# Altium PCB PCB1.PcbDoc
Units mm, origin at the board's own origin, x right, y up, seen from the top; angles counter-clockwise.
Board outline 36.5 x 37.5 mm, 4 copper layers (L1(Signal), L2(GND), L3(GND), L4(Signal)), stack 1.57 mm thick; 34 components, 28 nets, 174 pads, 138 vias.
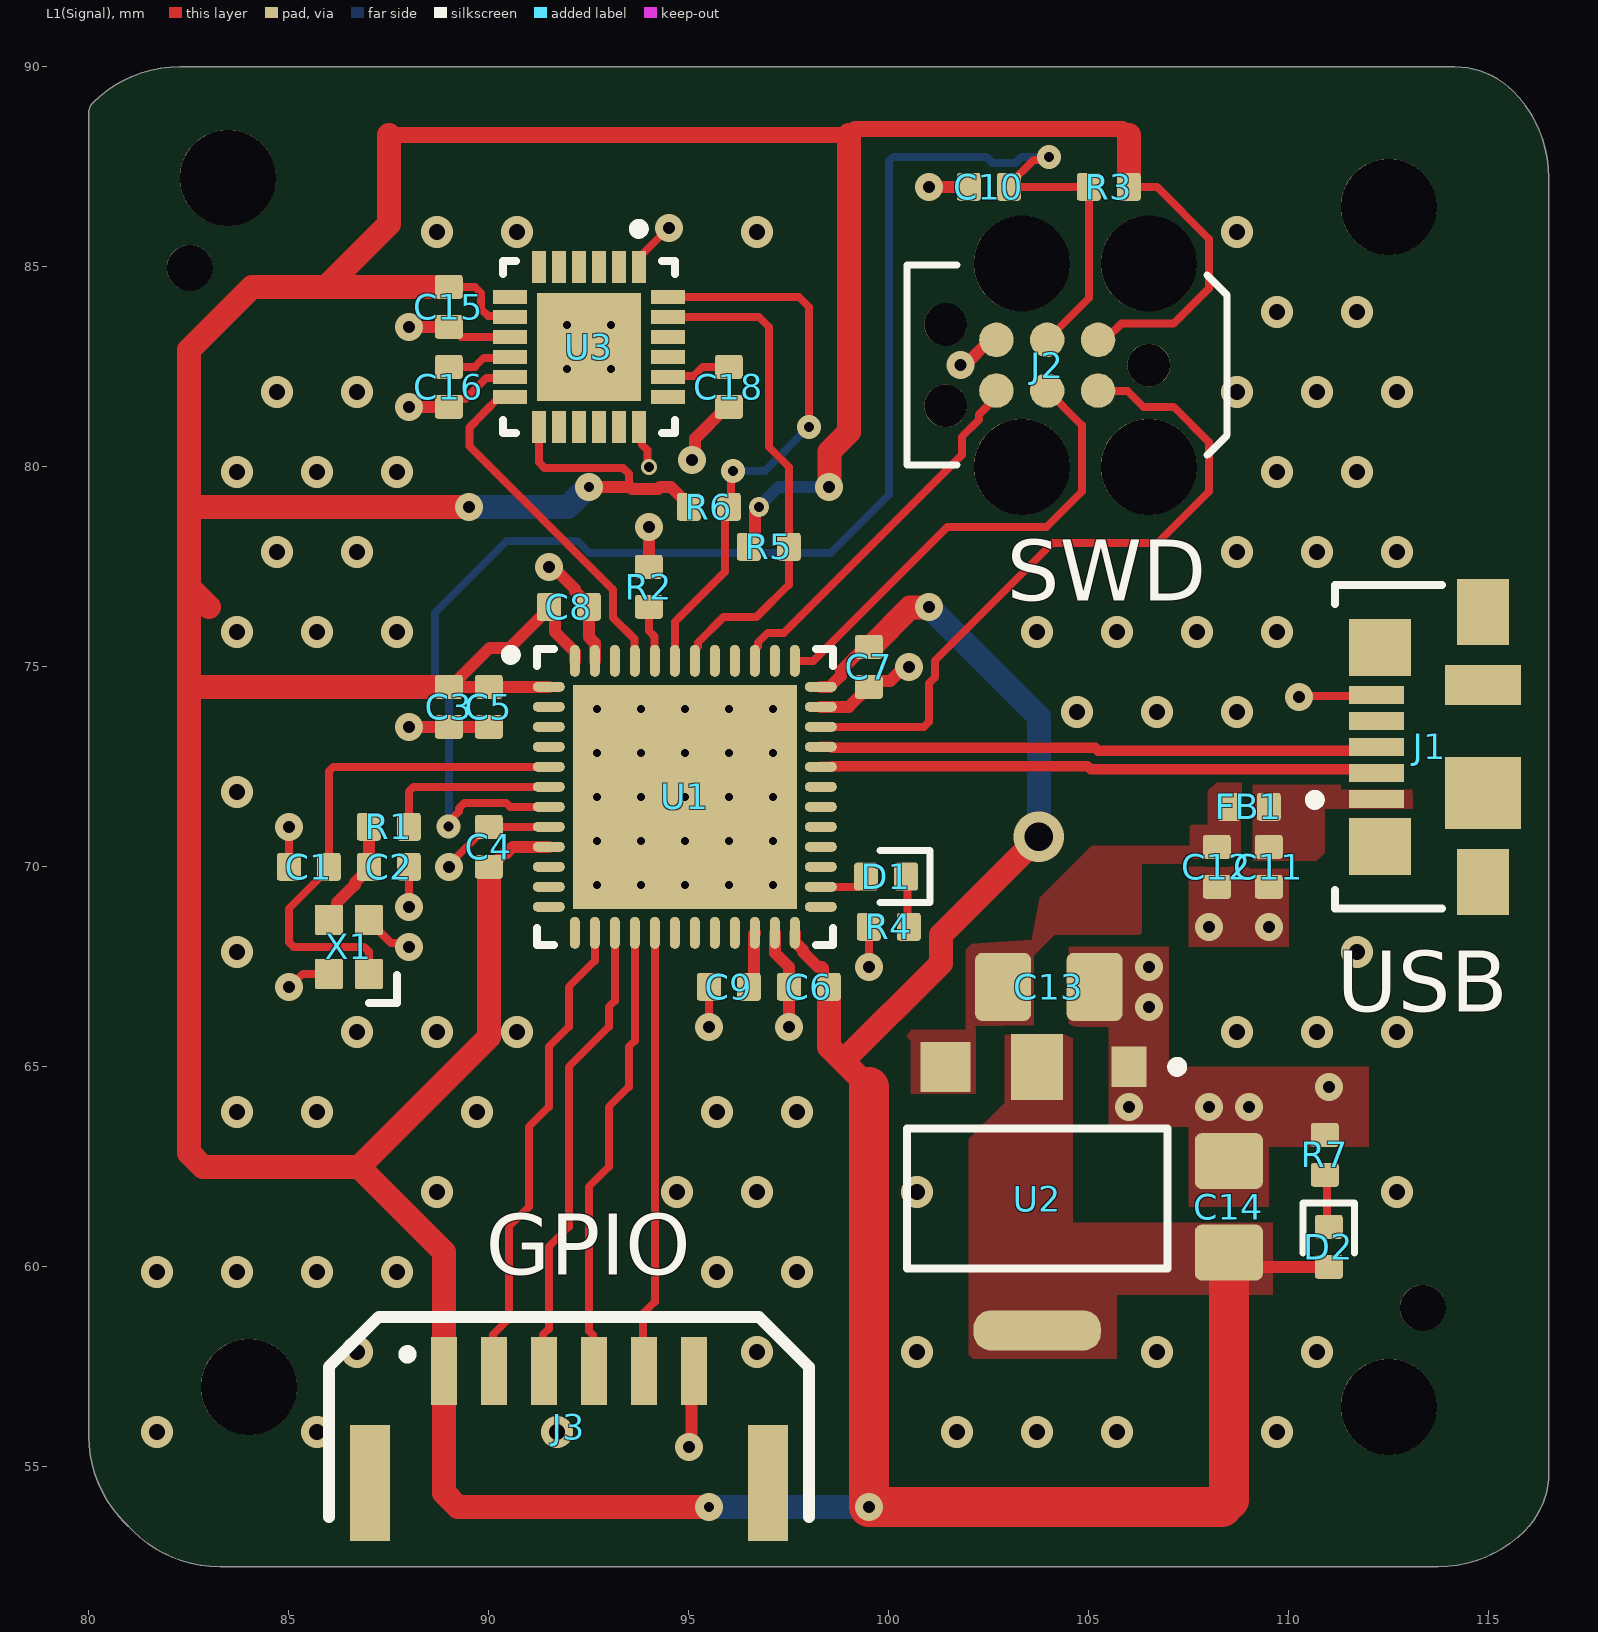
[diagram p0: L1(Signal) view]
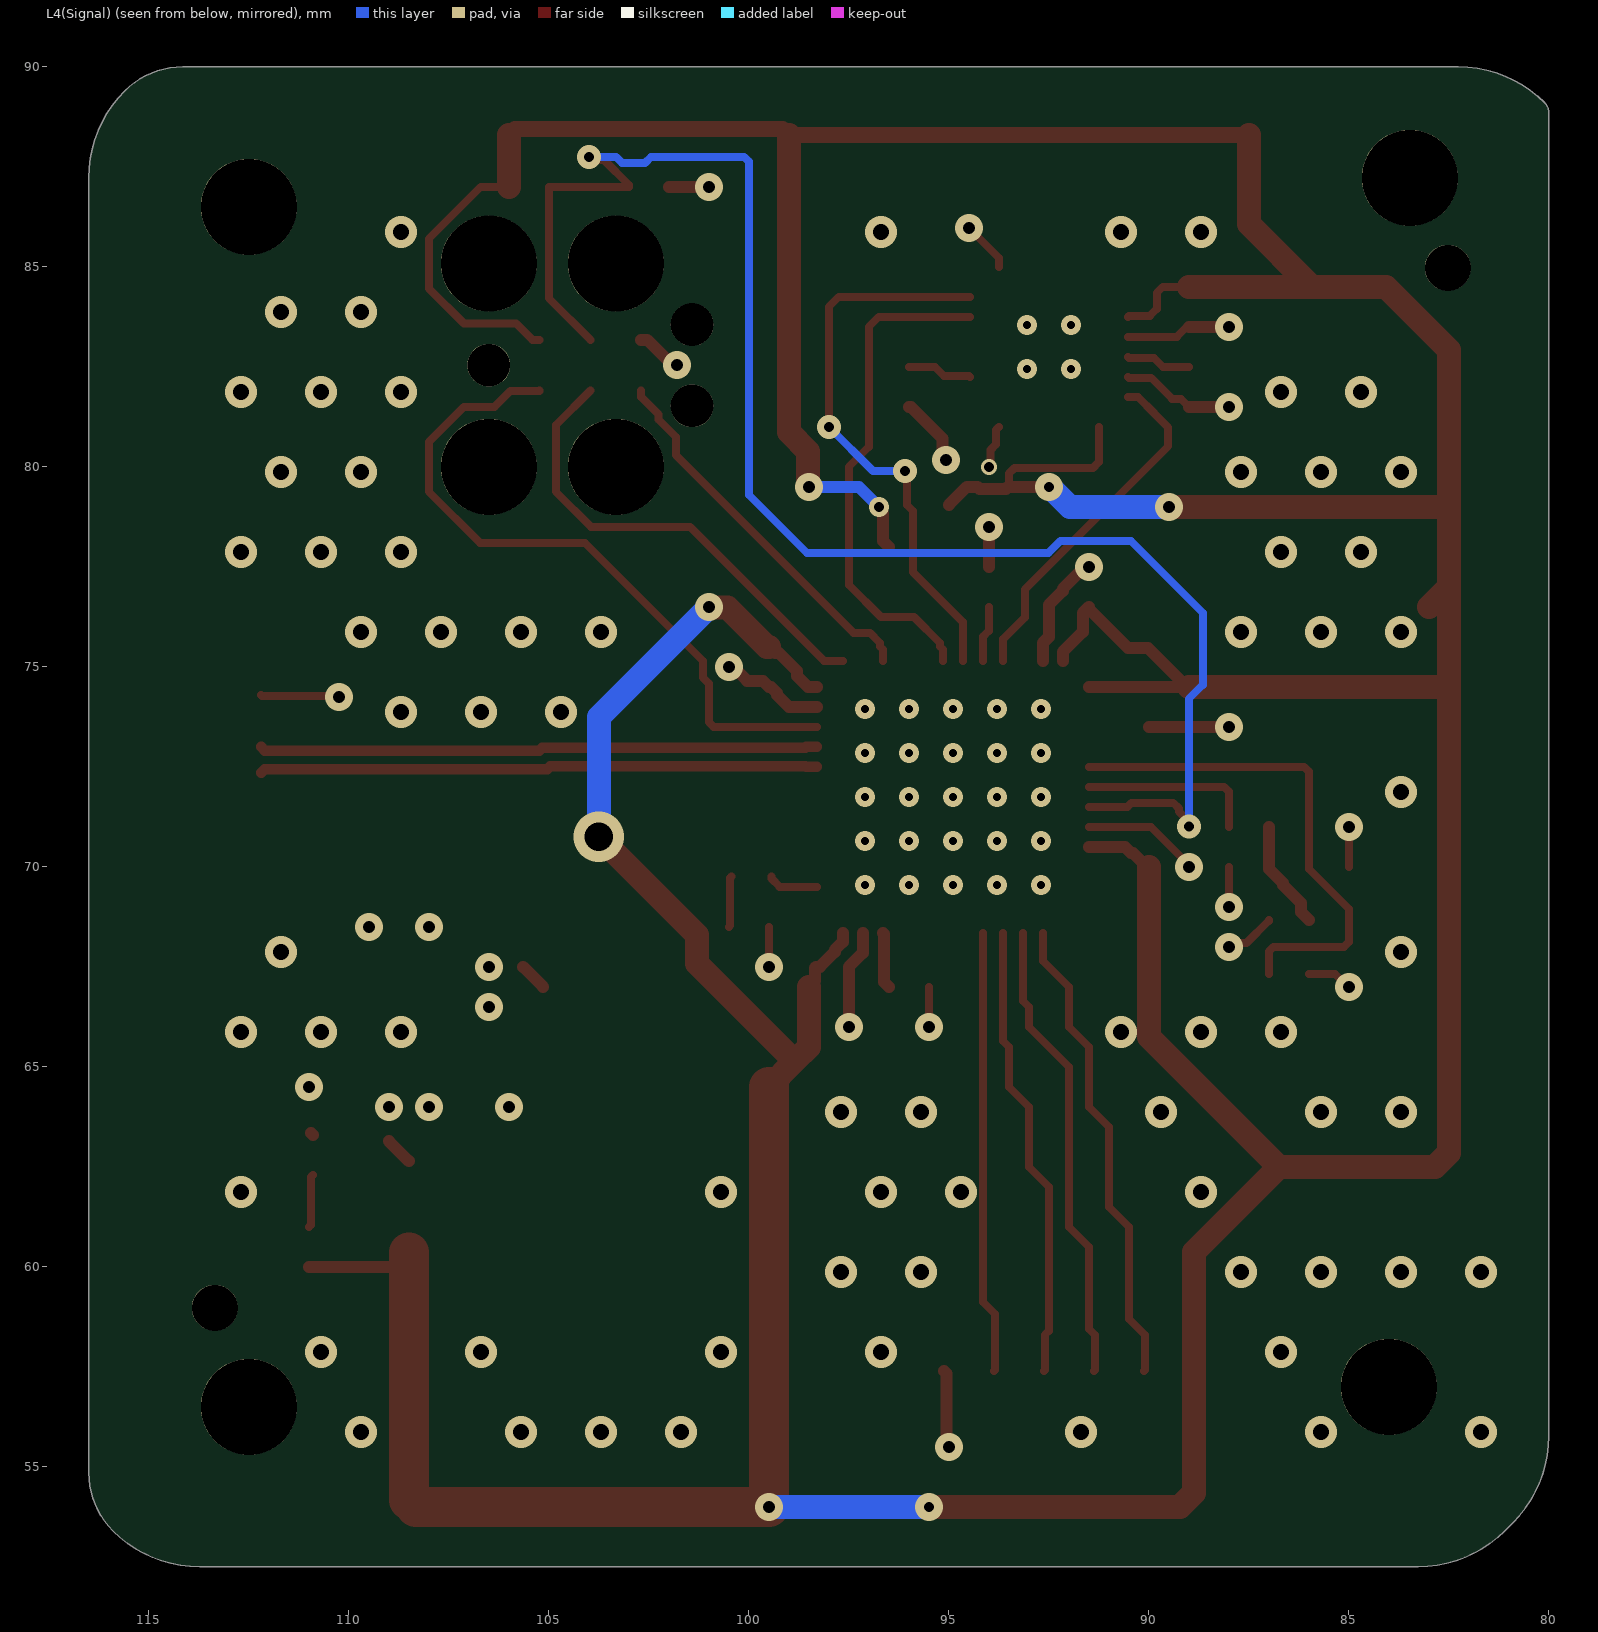
[diagram p1: L4(Signal) view, seen from below]
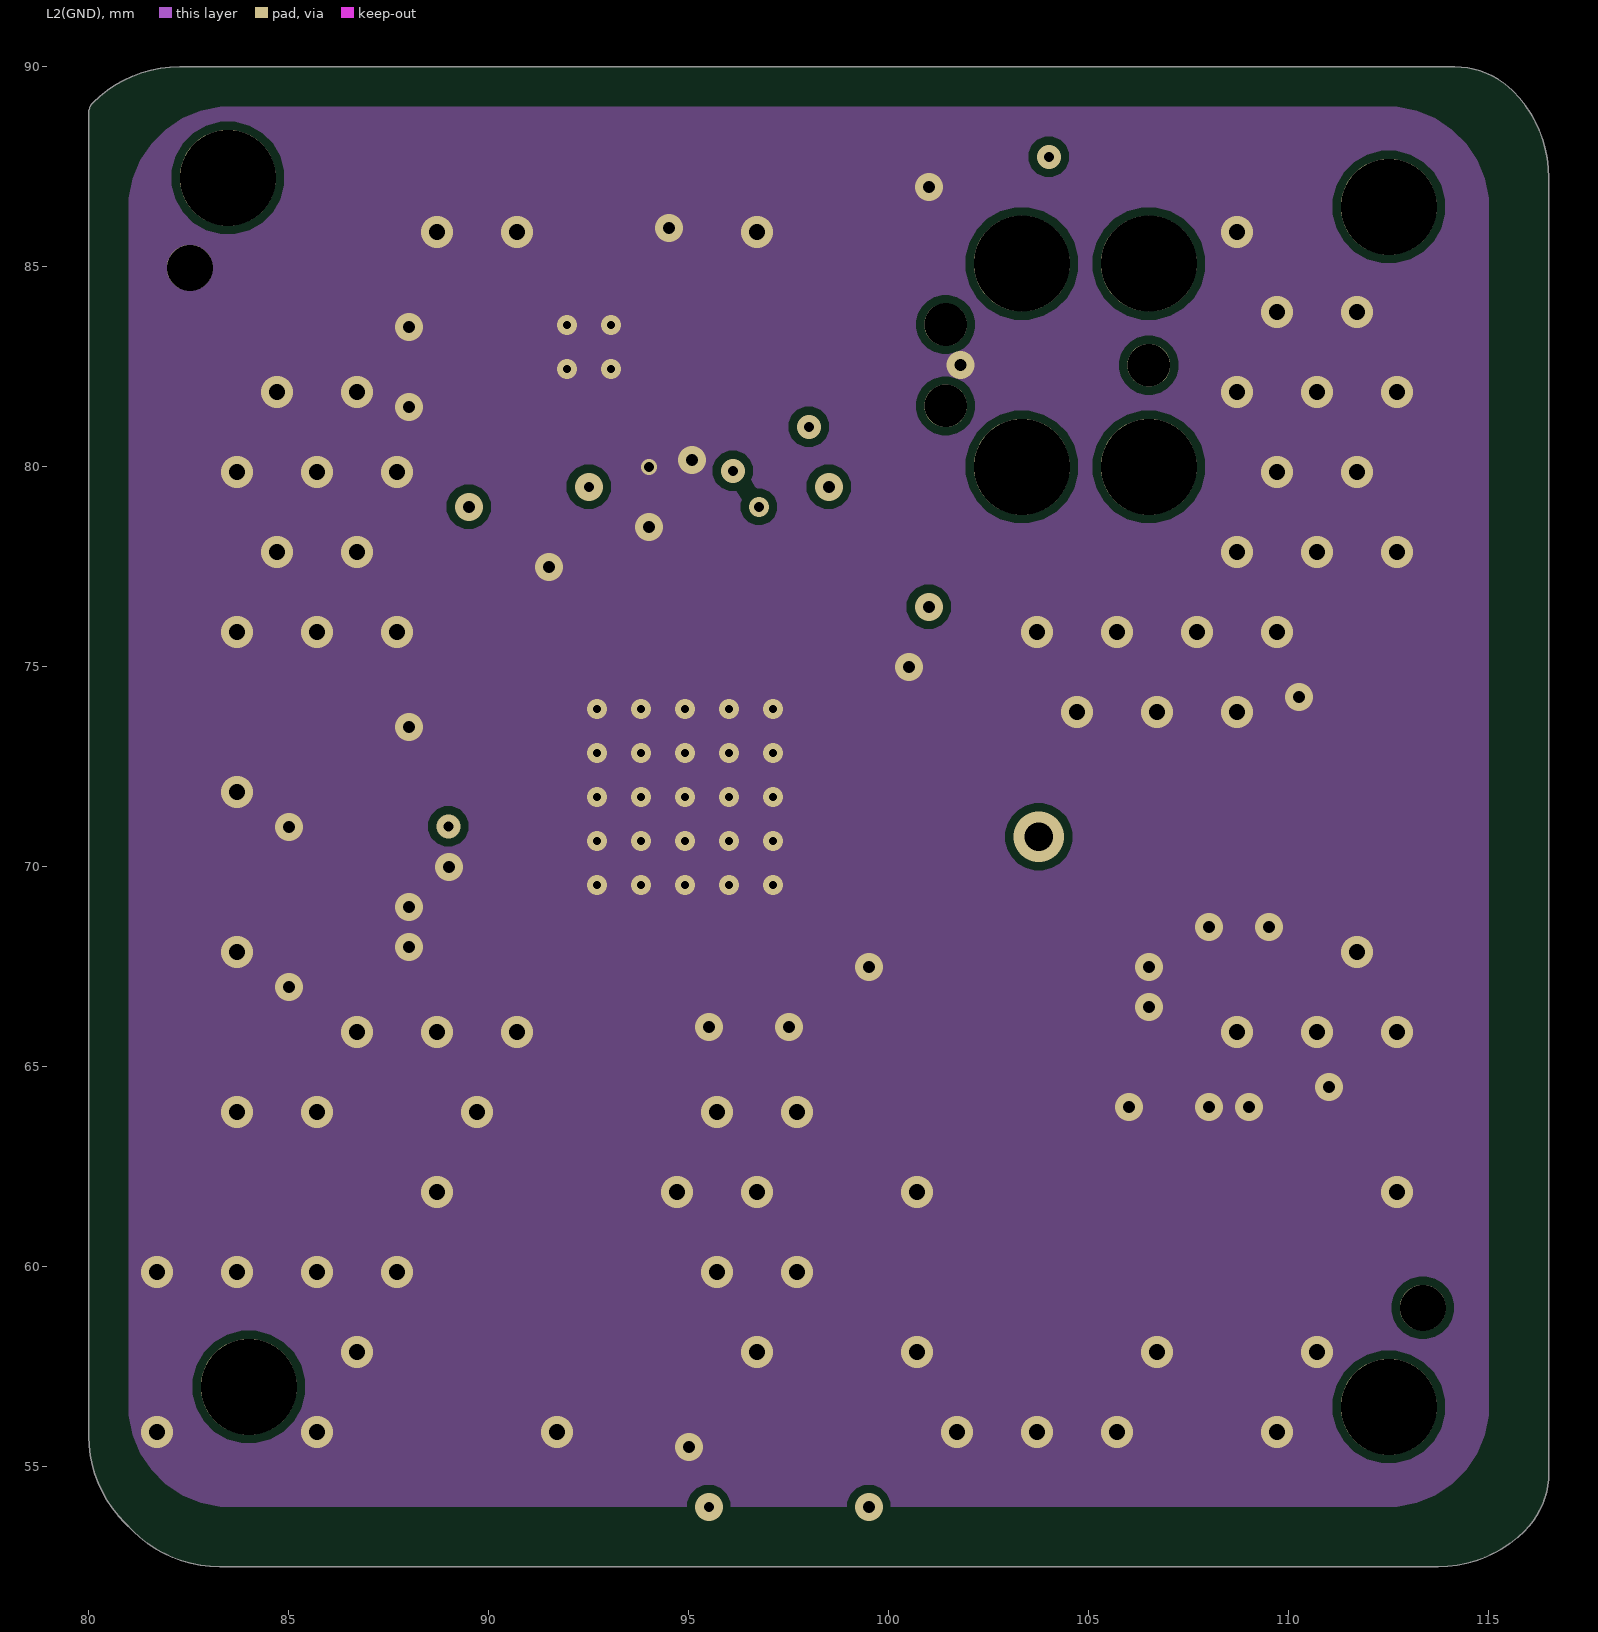
[diagram p2: L2(GND)]
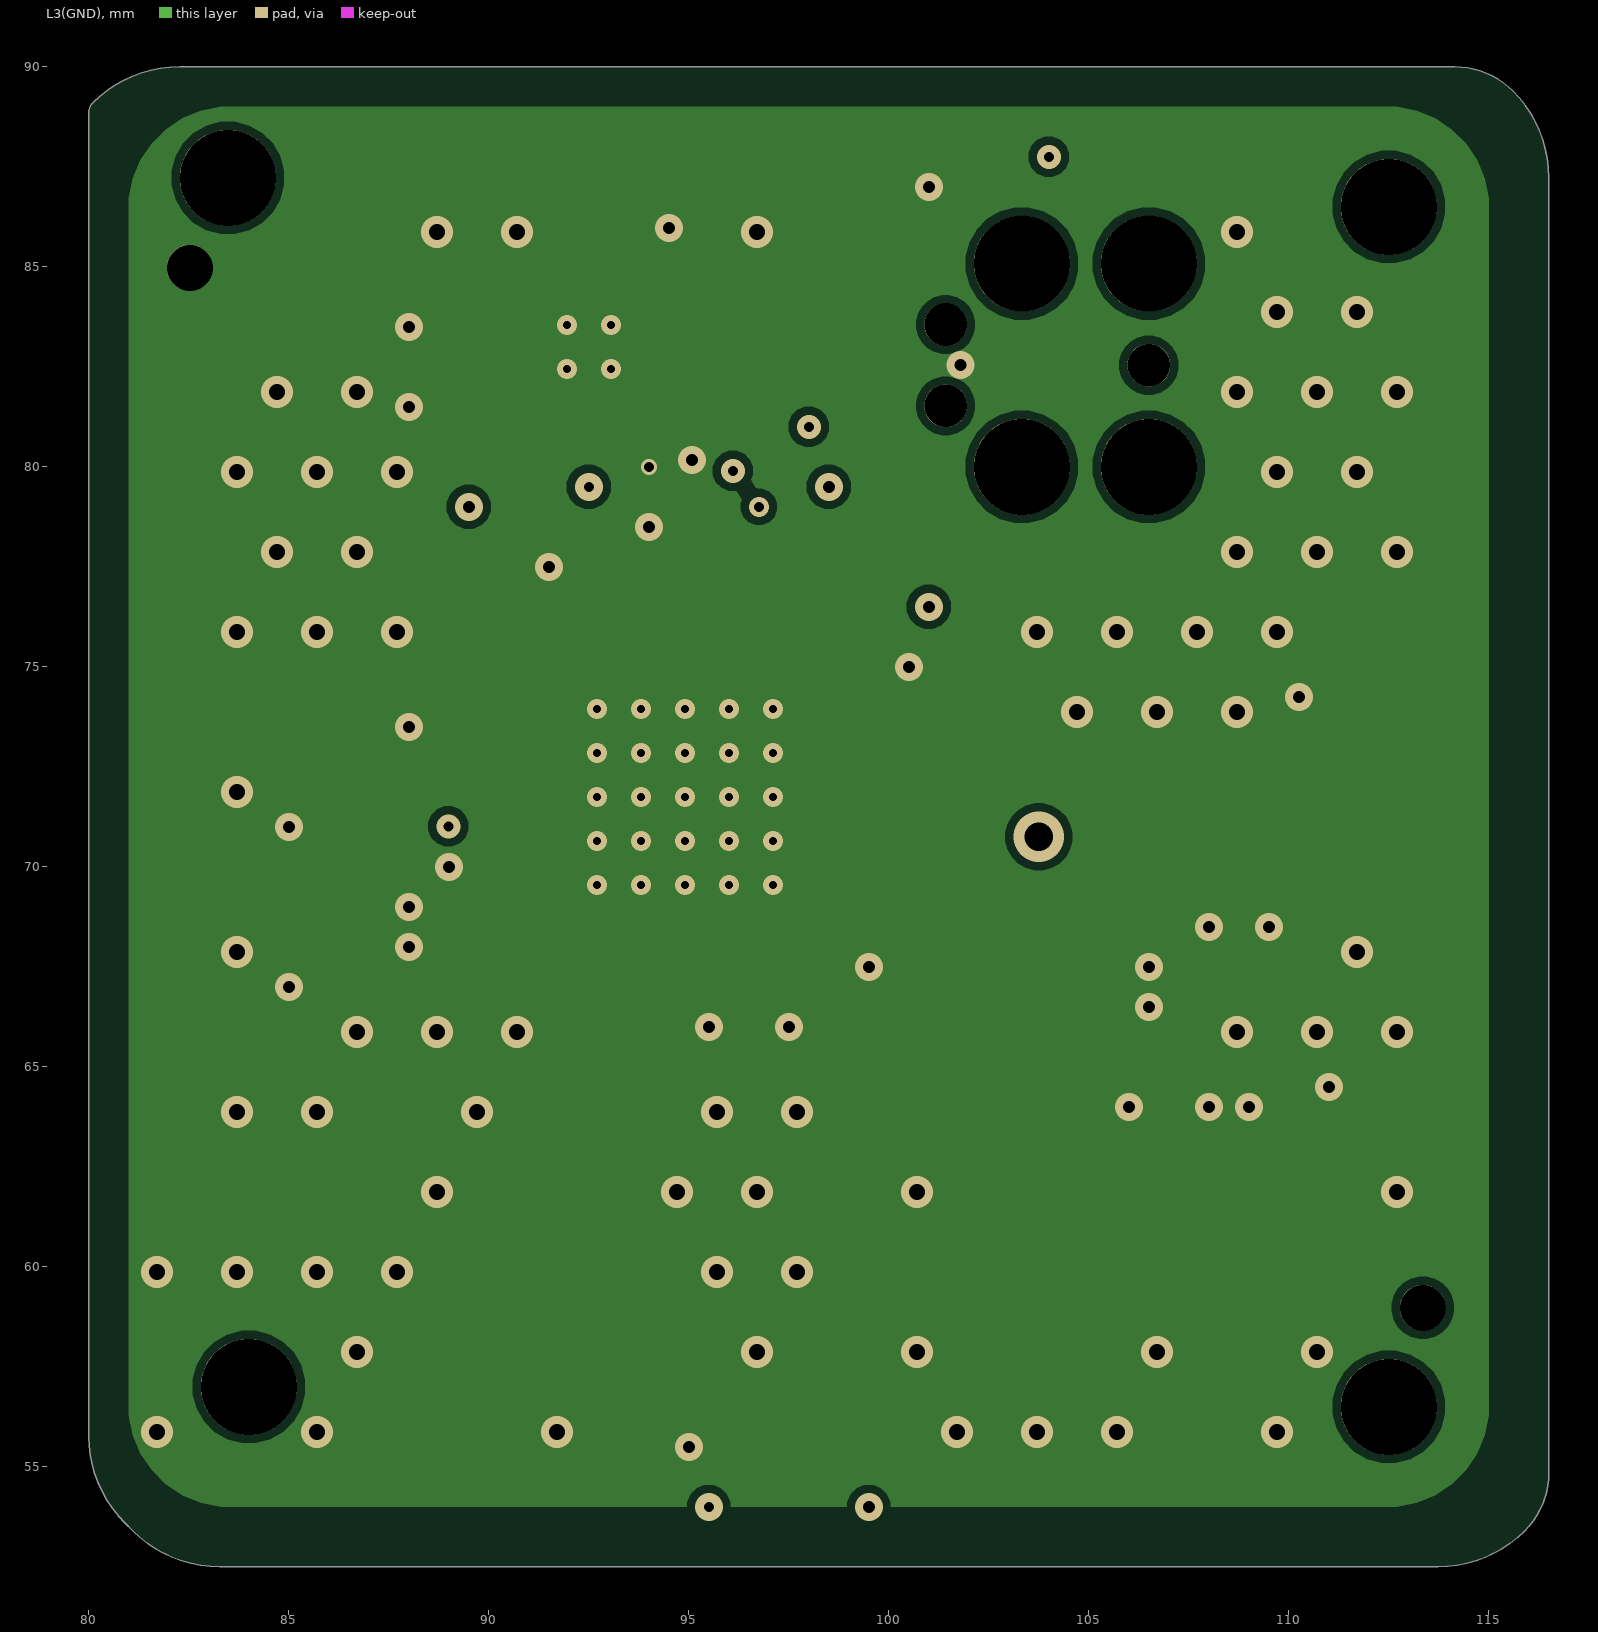
[diagram p3: L3(GND)]
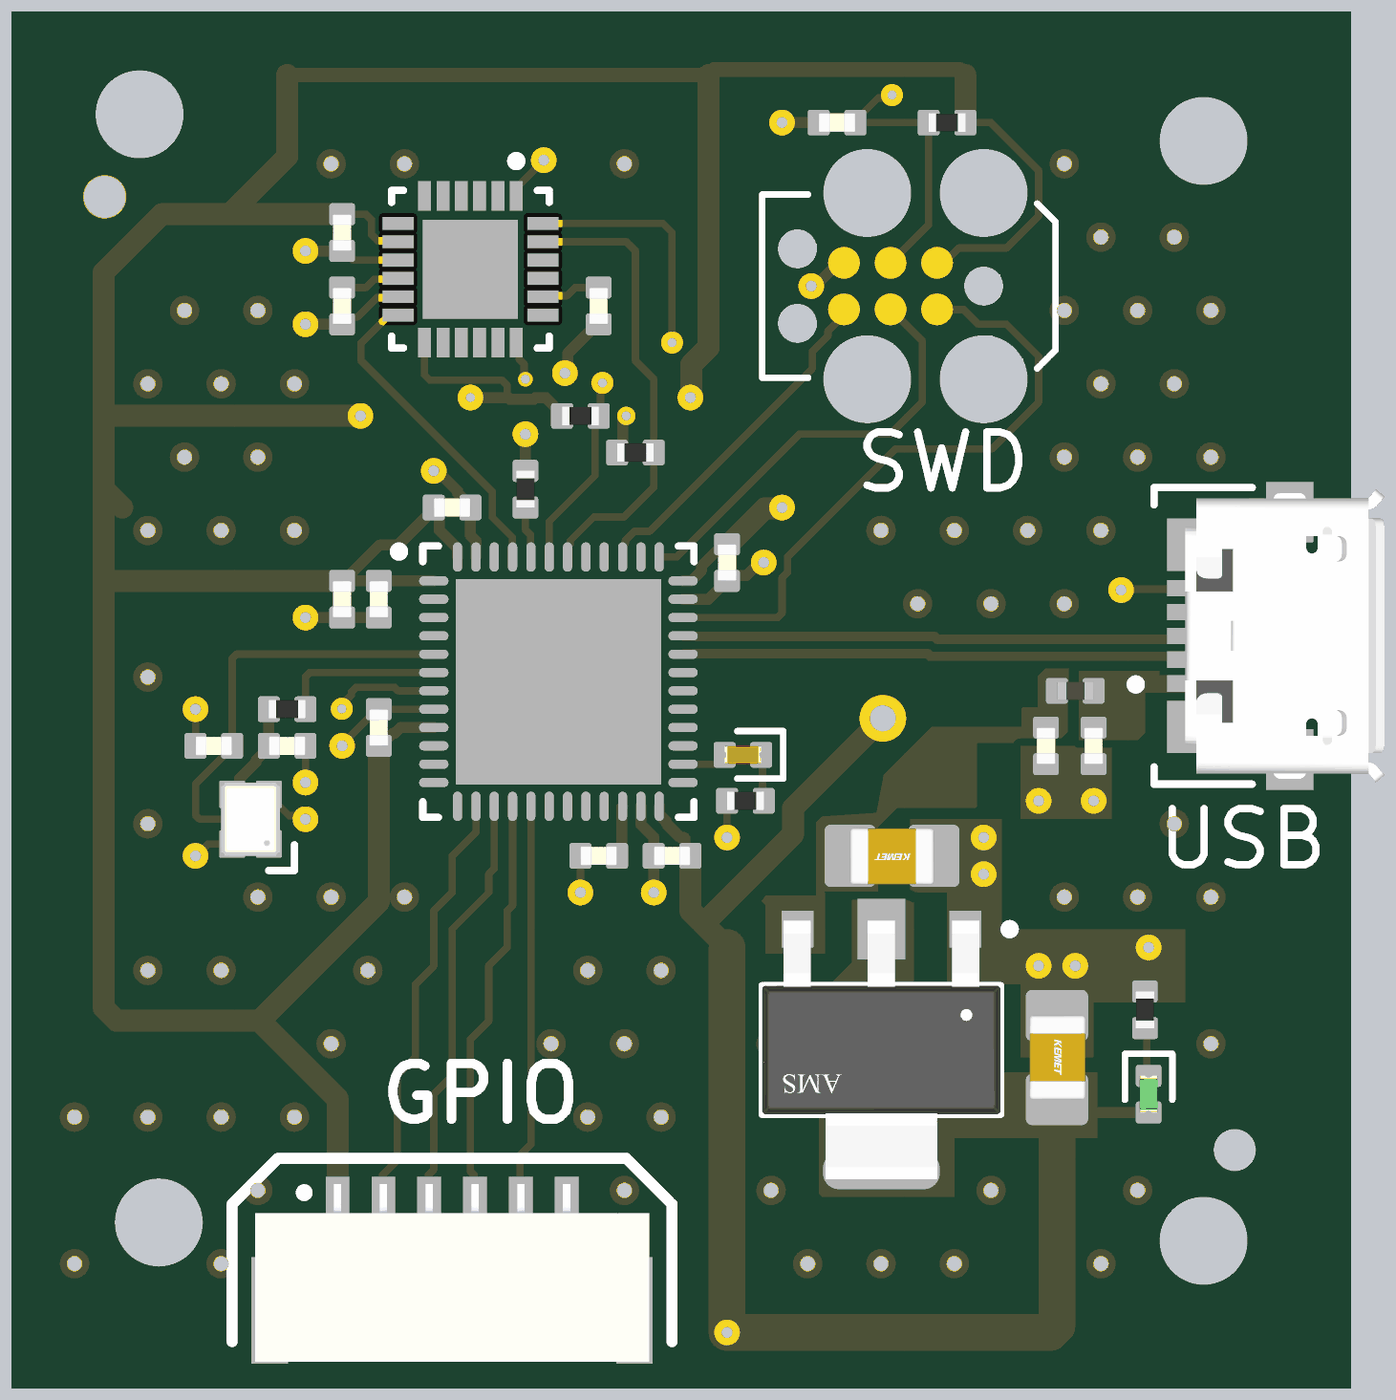
[diagram p4: 3D render of the assembled board from above, using the file's embedded part models]

## Layer stack, top to bottom
Top Solder: solder mask 0.0254, SM-001, Dk 4
L1(Signal): signal copper 0.035
Dielectric 1: prepreg 0.2, PP-017, Dk 4.6
L2(GND): signal copper 0.0175
Dielectric 3: core 1.065, Core-039, Dk 4.6
L3(GND): signal copper 0.0175
Dielectric 5: prepreg 0.2, PP-017, Dk 4.6
L4(Signal): signal copper 0.035
Bottom Solder: solder mask 0.0254, SM-001, Dk 4

## Board outline
80.898,53.602 cw(c83.066,55.77) 80,55.77 80,88.856 cw(c80.348,88.856) 80.102,89.102 cw(c82.27,86.934) 82.27,90 114.149,90 cw(c114.149,87.945) 115.602,89.398 cw(c113.434,87.23) 116.5,87.23 116.5,54.851 cw(c114.445,54.851) 115.898,53.398 cw(c113.73,55.566) 113.73,52.5 83.27,52.5 cw(c83.27,55.566) 81.102,53.398

## Design rules (kind name [scope] priority, off if disabled: settings)
Clearance [All] p1: gap=0.2 ignorepadtopadclearanceinfootprint=TRUE
DiffPairsRouting [All] p1: maxlimit=0.254 minlimit=0.203 mostfreqgap=0.254 toplayer_maxgap=0.203 toplayer_prefgap=0.203 toplayer_minwidth=0.26 toplayer_maxwidth=0.26 toplayer_prefwidth=0.26 bottomlayer_maxgap=0.203 bottomlayer_prefgap=0.203 bottomlayer_minwidth=0.26 bottomlayer_maxwidth=0.26 bottomlayer_prefwidth=0.26 impedanceprofiledriven=TRUE impedanceprofileid={84699088-A5C2-4269-9BF2-68A204645886} impedanceprofilevalue=90.000000 maxuncoupledlength=12.7
MinimumSolderMaskSliver [All] p1: minsoldermaskwidth=0.05
PolygonConnect [All] p1: connectstyle=Direct reliefconductorwidth=0.254 reliefentries=4 polygonreliefangle="90 Angle" airgapwidth=0.254
RoutingVias [All] p1: holewidth=0.3 width=0.7 viastyle="Through Hole" minholewidth=0.25 minwidth=0.55 maxholewidth=0.4 maxwidth=0.9
SilkToSolderMaskClearance [IsPad] p1: minsilkscreentomaskgap=0.1 clearancetoexposedcopper=TRUE
SolderMaskExpansion [All] p1: expansion=0 istentingtop=FALSE
SupplyNets "Schematic Supply Nets_5" [InNet('VBUS')] p1: voltage=0.000
SupplyNets "Schematic Supply Nets_4" [InNet('MCU_VCAP1')] p2: voltage=0.000
SupplyNets "Schematic Supply Nets_3" [InNet('+3V3')] p3: voltage=0.000
SupplyNets "Schematic Supply Nets_2" [InNet('G')] p4: voltage=0.000
SupplyNets "Schematic Supply Nets_1" [InNet('+5V')] p5: voltage=0.000
SupplyNets "Schematic Supply Nets" [InNet('3v3')] p6: voltage=0.000
UnRoutedNet [All] p1: checkbadconnections=TRUE
Width [All] p1: maxlimit=1 minlimit=0.2 preferedwidth=0.3 midlayer1_minwidth=0.254 midlayer1_maxwidth=0.254 midlayer1_prefwidth=0.254 midlayer2_minwidth=0.254 midlayer2_maxwidth=0.254 midlayer2_prefwidth=0.254 minimp=50.000000 maximp=50.000000 favimp=50.000000
26 further rules are at their usual default settings.

## Classes and differential pairs
differential pair class DIFF_USB: USB_D
differential pair USB_D: +USB_D_P -USB_D_N

## Components (designator, comment, footprint, x,y, rotation, side; value= is the part's Value field where it differs from the comment)
C1 "100n" CAP_0402 85.5,70 r0 top
C2 "100n" CAP_0402 87.5,70 r180 top
C3 "2u2" CAP_0402 89,74 r90 top
C4 "100n" CAP_0402 90,70.5 r270 top
C5 "100n" CAP_0402 90,74 r90 top
C6 "100n" CAP_0402 98,67 r0 top
C7 "100n" CAP_0402 99.5,75 r90 top
C8 "100n" CAP_0402 92,76.5 r180 top
C9 "2u2" CAP_0402 96,67 r180 top
C10 "2u2" CAP_0402 102.5,87 r0 top
C11 "2u2" CAP_0402 109.5,70 r90 top
C12 "2u2" CAP_0402 108.2,70 r90 top
C13 "22u" CAP_0805 104,67 r180 top
C14 "22u" CAP_0805 108.5,61.5 r270 top
C15 "100n" CAP_0402 89,84 r90 top
C16 "100n" CAP_0402 89,82 r90 top
C18 "2u2" CAP_0402 96,82 r90 top
D1 "RED" LED_0402_RED 99.933,69.755 r0 top
D2 "GREEN" LED_0402_GREEN 111,60.5 r90 top
FB1 "120R" FB_0402 109,71.5 r180 top
J1 "473460001" FP-473460001-MFG 114.5,73 r90 top
J2 "TC2030" TC2030-FP 103.96,82.54 r180 top
J3 "SM06B-GHS-TB" SM06B-GHS-TB 92,56 r0 top
R1 "R0" RES_0402 87.5,71 r0 top
R2 "10K" RES_0402 94,77 r270 top
R3 "10K" RES_0402 105.5,87 r0 top
R4 "1K" RES_0402 100,68.5 r0 top
R5 "2k2" RES_0402 97,78 r180 top
R6 "2k2" RES_0402 95.5,79 r180 top
R7 "1K" RES_0402 110.9,62.8 r270 top
U1 "STM32F411CEU6" STM-UFQFPN48_L 94.9,71.75 r0 top
U2 "AMS1117-3.3" FP-AMS1117-IPC_C 103.71,61.705 r270 top
U3 "MPU-6050" IS-QFN-24_V 92.5,83 r270 top
X1 "24MHz" XTAL_2016 86.5,68 r90 top

## Footprints (in the part's own frame and the unit in brackets; to place one, negate y for a bottom-side part, rotate by r counter-clockwise, add the part's x,y. Pads: shape width x height; smd on the part's side, far side on the other; paste and mask are expansions set on the pad)
CAP_0402 [mm]
  rrect25% 0.6x0.7 smd: 1(-0.5,0) 2(0.5,0)
  body extent -0.5,-0.26 0.5,0.26, height 0.37
CAP_0805 [mm]
  rrect25% 1.4x1.7 smd: 1(-1.143,0) 2(1.143,0)
  body extent -1.15,-0.76 1.15,0.79, height 1.01
FB_0402 [mm]
  rrect25% 0.6x0.7 smd: 1(-0.5,0) 2(0.5,0)
  body extent -0.5,-0.25 0.5,0.25, height 0.51
FP-473460001-MFG [mm]
  rect 0.45x1.38 smd paste+0 mask+0: 1(-1.3,2.31) 2(-0.65,2.31) 3(0,2.31) 4(0.65,2.31) 5(1.3,2.31)
  rect 1.425x1.55 smd paste+0 mask+0: 6(-2.488,2.225) 7(2.488,2.225)
  rect 1.65x1.3 smd paste+0 mask+0: 8(-3.375,-0.35) 11(3.375,-0.35)
  rect 1.8x1.9 smd paste+0 mask+0: 9(-1.15,-0.35)
  rect 1x1.9 smd paste+0 mask+0: 10(1.55,-0.35)
  silkscreen extent -4.05,0.67 4.05,3.97, body extent -4.3,-2.48 4.3,3.45, height 0.25
FP-AMS1117-IPC_C [mm]
  rect 1.004x0.872 smd paste+0 mask+0: 1(-3.295,2.29)
  rect 1.65x1.3 smd paste+0 mask+0: 2(-3.295,0)
  rect 1.25x1.25 smd paste-2539.97 mask-2539.97: 3(-3.295,-2.29)
  rrect87% 1.004x3.182 smd paste+0 mask+0: 4(3.295,0)
  silkscreen extent -3.42,-3.25 1.75,3.63, body extent -3.9,-3.35 3.9,3.35, height 0.25
IS-QFN-24_V [mm] "QFN, 24-Leads, Body 4x4mm, Pitch 0.5mm, Thermal Pad 2.7x2.6mm"
  rect 0.8x0.35 smd: 1(-2,1.25) 2(-2,0.75) 3(-2,0.25) 4(-2,-0.25) 5(-2,-0.75) 6(-2,-1.25) 13(2,-1.25) 14(2,-0.75) 15(2,-0.25) 16(2,0.25) 17(2,0.75) 18(2,1.25)
  rect 0.35x0.85 smd mask+0.102: 7(-1.25,-1.975) 8(-0.75,-1.975) 9(-0.25,-1.975) 10(0.25,-1.975) 11(0.75,-1.975) 12(1.25,-1.975) 19(1.25,1.975) 20(0.75,1.975) 21(0.25,1.975) 22(-0.25,1.975) 23(-0.75,1.975) 24(-1.25,1.975)
  rect 2.7x2.6 smd: 25(0,0)
  silkscreen extent -3.07,-2.15 2.15,2.15, body extent -2,-2 2,2, height 0.95
LED_0402_GREEN [mm]
  rrect25% 0.6x0.7 smd: A(-0.5,0) K(0.5,0)
  silkscreen extent -0.15,-0.65 1.1,0.65, body extent -0.51,-0.25 0.51,0.25, height 0.45
LED_0402_RED [mm]
  rrect25% 0.6x0.7 smd: A(-0.5,0) K(0.5,0)
  silkscreen extent -0.15,-0.65 1.1,0.65, body extent -0.51,-0.25 0.51,0.25, height 0.45
RES_0402 [mm]
  rrect25% 0.6x0.7 smd: 1(-0.5,0) 2(0.5,0)
  body extent -0.5,-0.25 0.5,0.25, height 0.3
SM06B-GHS-TB [mm]
  rect 0.65x1.7 smd: 1(-3.125,1.4) 2(-1.875,1.4) 3(-0.625,1.4) 4(0.625,1.4) 5(1.875,1.4) 6(3.125,1.4)
  rect 1x2.9 smd: ""(-4.975,-1.4) ""(4.975,-1.4)
  silkscreen extent -6,-2.25 6,2.75, body extent -5.38,-2.8 5.38,2.05, height 4.26
STM-UFQFPN48_L [mm] "QFN, 48-Leads, Body 7.1x7.1mm, Pitch 0.5mm, Thermal Pad 5.6x5.6mm, IPC High Density"
  oval 0.8x0.25 smd: 1(-3.4,2.75) 2(-3.4,2.25) 3(-3.4,1.75) 4(-3.4,1.25) 5(-3.4,0.75) 6(-3.4,0.25) 7(-3.4,-0.25) 8(-3.4,-0.75) 9(-3.4,-1.25) 10(-3.4,-1.75) 11(-3.4,-2.25) 12(-3.4,-2.75) 25(3.4,-2.75) 26(3.4,-2.25) 27(3.4,-1.75) 28(3.4,-1.25) 29(3.4,-0.75) 30(3.4,-0.25) 31(3.4,0.25) 32(3.4,0.75) 33(3.4,1.25) 34(3.4,1.75) 35(3.4,2.25) 36(3.4,2.75)
  oval 0.25x0.8 smd: 13(-2.75,-3.4) 14(-2.25,-3.4) 15(-1.75,-3.4) 16(-1.25,-3.4) 17(-0.75,-3.4) 18(-0.25,-3.4) 19(0.25,-3.4) 20(0.75,-3.4) 21(1.25,-3.4) 22(1.75,-3.4) 23(2.25,-3.4) 24(2.75,-3.4) 37(2.75,3.4) 38(2.25,3.4) 39(1.75,3.4) 40(1.25,3.4) 41(0.75,3.4) 42(0.25,3.4) 43(-0.25,3.4) 44(-0.75,3.4) 45(-1.25,3.4) 46(-1.75,3.4) 47(-2.25,3.4) 48(-2.75,3.4)
  rect 5.6x5.6 smd: 49(0,0)
  silkscreen extent -4.47,-3.7 3.7,3.7, body extent -3.55,-3.55 3.55,3.55, height 0.6
TC2030-FP [mm]
  round 0.863 smd paste-0.432: 1(-1.27,-0.635) 2(-1.27,0.635) 3(0,-0.635) 4(0,0.635) 5(1.27,-0.635) 6(1.27,0.635)
  round 2.4 hole 2.4 unplated: MH(-2.54,2.54) MH(-2.54,-2.54) MH(0.635,2.54) MH(0.635,-2.54)
  round 1.067 hole 1.067 unplated: MH(-2.54,0) MH(2.54,-1.016) MH(2.54,1.016)
  silkscreen extent -4.5,-2.5 3.5,2.5
XTAL_2016 [mm]
  rrect10% 0.75x0.7 smd: 1(-0.675,-0.5) 2(0.675,-0.5) 3(0.675,0.5) 4(-0.675,0.5)
  silkscreen extent -1.4,-1.2 -0.7,-0.5, body extent -1,-0.8 1,0.8, height 0.7

## Part data
C1 C2 C3 C4 C5 C6 C7 C8 C9 C10 C11 C12 C15 C16 C18: library part CAP_0402, "Capacitor SMD 0402"
C13 C14: library part CAP_0805, "Capacitor SMD 0805"
D1: library part LED_0402_RED, "LED 0402 RED SMD"
D2: library part LED_0402_GREEN, "LED 0402 GREEN SMD"
FB1: library part FB_0402, "Ferrite Bead SMD 0402"
J1: library part CMP-2000-05246-2, "CONN RCPT USB2.0 MICRO B SMD R/A", Current Rating=1.8A, Manufacturer=Molex, Package=0, Temperature="-30°C to +85°C", Temperature Range High=+85°C, Temperature Range Low=-30°C, Voltage Rating=30V, Automotive=No, Category=Conn, ComponentLink2Description=Datasheet, ComponentLink2URL=https://www.molex.com/webdocs/datasheets/pdf/en-us/0473460001_IO_CONNECTORS.pdf, Conn Orientation="Right Angle", Contact Material=Gold,Nickel, Device Class L1=Connectors, Device Class L2="USB Connectors", Device Class L3=unset, Digikey Description="CONN RCPT USB2.0 MICRO B SMD R/A", Footprint Url=https://www.molex.com/pdm_docs/sd/473460001_sd.pdf, Height=2.945mm, Is Female=yes, Lead Free=Yes, Manufacturer Part Number=473460001, Number Of Contacts=5, Octopart=https://octopart.com/47346-0001-molex-7164928, Pitch=0.65mm, RoHS=TRUE, Shielding=true, Usb Standard="USB 2.0"
J2: "Tag-Connect No-Solder SWD Debug Connector DO NOT PLACE", Manufacturer=Tag-Connect, Manufacturer Part Number=TC2030
J3: "Header Connector 6 Position 1.25MM Pitch SMD Horizontal JST GH", Manufacturer=JST, Manufacturer Part Number=SM06B-GHS-TB
R1 R2 R3 R4 R5 R6 R7: library part RES_0402, "Resistor SMD 0402"
U1: library part CMP-0243-00165-1, "ARM Cortex-M4 32-bit MCU+FPU, 512 KB Flash, 128 KB RAM, 36 I/Os, 48-Pin UFQFPN, -40 to 85 degC, Tray", I/Os (High Current)=36, Operating Frequency(F) (Processor speed) (MHz)=100, Package Description=UFQFPN48, Package Reference="48-Pin Ultra Thin Fine Pitch Quad Flat No-Lead, 7 x 7 x 0.6 mm Body, 0.5 mm Pitch, Exposed Pad", Supply Voltage(Vcc) min (V)=1.7, ComponentLink1Description="Manufacturer URL", ComponentLink1URL=http://www.st.com/, ComponentLink2Description=Datasheet, ComponentLink2URL=http://www.st.com/st-web-ui/static/active/en/resource/technical/document/datasheet/DM00115249.pdf, Core="ARM Cortex-M4", DatasheetVersion="Rev. 6", FLASH Size (Prog) (kB)=512, Internal RAM Size (kB)=128, Mounting Technology="Surface Mount", Packing=Tray
U2: library part CMP-209535-000001-1, "LDO Voltage Regulators 1A, 3.3V", Dropout Voltage=1.1V, Manufacturer="Advanced Monolithic Systems", Max Junction Temp=+125°C, Max Power Dissipation=1.2W, Max Supply Voltage=15V, Nominal Supply Current=5mA, Output Current=1A, Output Voltage=3.3V, Package=AMS1117, Temperature="-40°C to +125°C", Temperature Range Low=-40°C, Automotive=No, Category=IC, ComponentLink2Description=Datasheet, ComponentLink2URL=http://www.advanced-monolithic.com/pdf/ds1117.pdf, Device Class L1="Integrated Circuits (ICs)", Device Class L2="Power Management ICs", Device Class L3="Voltage Regulators - Linear", Height=1.8mm, Ipc Land Pattern Name=SOT229P700X180-4, Lead Free=Yes, Manufacturer Part Number=AMS1117-3.3, Number Of Outputs=1, Octopart=https://octopart.com/ams1117-3.3-advanced+monolithic+systems-25899300, Output Type=Fixed, RoHS=TRUE, Standoff Height=0.64mm, Temperature Range High=+125°C
U3: library part CMP-1753-00002-2, "3-Axis Gyroscope, Accelerometer and a Digital Motion Processor(TM) (DMP), 2.375 to 3.46 V, -40 to 85 degC, 24-Pin QFN, RoHS, Tape and Reel", Manufacturer=InvenSense, Standard Package=5,000, Category=Sensors,Transducers, Datasheet URL=http://datasheet.octopart.com/MPU-6050-InvenSense-datasheet-14421344.pdf, Datasheet Version="Rev. 3.3, 05/2012", Dynamic Catalog=MPU-6000™Series, Family=Multifunction, Featured Product=MPU-60506-Axis,IntegratedI²CSolution, Manufacturer URL=http://www.invensense.com/, Online Catalog=MPU-6000™Series, Other Names="1428-1007-2 / MPU6050", Output Type=Digital, Sensor Type=MotionTracking, Unit PriceUSD=Digital
X1: library part XTAL_2016, "Crystal SMD 4-Pin 2.0x1.6mm"

## Free pads (board coordinates)
  round 2.4 hole 2.4 unplated: MH1(84,57) MH2(83.475,87.225) MH3(112.5,86.5) MH4(112.5,56.5)
  round 1.152 hole 1.152: TH(82.525,84.975)
  round 1.152 hole 1.152 unplated: TH(113.35,58.975)

## Via types
v1: diameter 0.8, hole 0.4, L1(Signal) to L4(Signal), tented both sides, 68 vias
v2: diameter 0.7, hole 0.3, L1(Signal) to L4(Signal), 32 vias
v3: diameter 0.5, hole 0.2, L1(Signal) to L4(Signal), 29 vias
v4: diameter 0.6, hole 0.25, L1(Signal) to L4(Signal), 4 vias
v5: diameter 0.7, hole 0.25, L1(Signal) to L4(Signal), 2 vias
v6: diameter 0.4, hole 0.25, L1(Signal) to L4(Signal), 1 vias
v7: diameter 1.27, hole 0.711, L1(Signal) to L4(Signal), 1 vias
v8: diameter 0.5, hole 0.25, L1(Signal) to L4(Signal), 1 vias

## Nets (pads, with @x,y where several pads share a name; then routed paths per layer and width w, separated by ;. In a path a pad name is that pad's centre, name@x,y a point inside that pad or via, vN(x,y) a via of type N, cw(c..) or ccw(c..) an arc to the next point about the centre after c; other vN are vias at no path point)
3v3: 
+3V3: C3.2 C4.2 C5.2 C6.2 C7.2 C8.2 C14.2 C15.2 D2.A J2.1 J3.1 R3.2 R5.2 R6.2 U1.1 U1.9 U1.24 U1.36 U1.48 U2.2 U2.4 U3.8 U3.13 | length 189.9
  L1(Signal) w0.2: C15.2 89.65,84.5 89.8,84.35 89.8,83.951 89.976,83.775 90.5,83.775 U3.8 ; U3.13 91.25,80.117 91.393,79.974 93.357,79.974 93.5,79.831 93.5,79.525 93.525,79.5 ; J2.1 105.409,83.175 105.814,83.58 107.121,83.58 108,84.459 108,85.701 106.701,87 R3.2
  L1(Signal) w0.3: C4.2@90.05,70 90.4,70.35 90.451,70.35 90.601,70.5 U1.9 ; U1.1 C5.2 C3.2 89.05,74.5 90.025,75.475 90.525,75.475 91.5,76.45 C8.2 91.65,76.35 91.65,75.875 92.15,75.375 U1.48 ; v5(92.5,79.5) 93.525,79.5 93.575,79.45 94.228,79.45 94.278,79.5 94.55,79.5 R6.2@95,79.05 ; R5.2 96.65,78.15 96.65,78.846 96.75,78.946 v8(96.75,79) ; U1.24 97.65,68.125 97.85,67.925 97.85,67.876 98.226,67.5 98.324,67.5 98.35,67.474 98.35,67.15 C6.2 ; U1.36 98.525,74.5 98.8,74.775 98.8,74.901 99.249,75.35 99.35,75.35 C7.2 ; 108.324,54 108.5,54.176 ; C14.2 108.857,60 D2.A
  L1(Signal) w0.4: 87.5,88.297 99,88.297 99.153,88.45 105.847,88.45 106,88.297
  L1(Signal) w0.6: 83,76.5 82.5,77 ; 87.5,88.297 87.5,86.074 85.926,84.5 ; C3.2 82.5,74.5 ; C15.2 85.926,84.5 ; v2(89.5,79) 82.5,79 ; C4.2 90,65.75 86.75,62.5 ; v5(95.5,54) 89.226,54 88.875,54.351 J3.1 88.875,60.375 86.75,62.5 ; C6.2 98.5,65.5 98.857,65.143 ; v2(98.5,79.5) 98.519,79.519 98.519,80.388 99,80.869 99,88.297 ; 99.5,64.5 98.857,65.143 ; C7.2 99.55,75.5 100.531,76.481 100.981,76.481 v2(101,76.5) ; v7(103.75,70.75) 101.3,68.3 101.3,67.586 98.857,65.143 ; R3.2 106,88.297 ; 82.5,74.5 82.5,77 ; 82.5,74.5 82.5,62.851 82.851,62.5 86.75,62.5 ; 82.5,77 82.5,79 ; 82.5,79 82.5,82.925 84.075,84.5 85.926,84.5
  L1(Signal) w1: 99.5,64.5 v2(99.5,54) 108.324,54 ; 108.5,54.176 C14.2
  L4(Signal) w0.3: v8(96.75,79) 97.25,79.5 v2(98.5,79.5)
  L4(Signal) w0.6: v2(89.5,79) 91.973,79 92.473,79.5 v5(92.5,79.5) ; v5(95.5,54) v2(99.5,54) ; v2(101,76.5) 103.75,73.75 v7(103.75,70.75)
+5V: C12.2 C13.2 FB1.2 U2.3
G: C1.1 C2.1 C3.1 C4.1 C5.1 C6.1 C7.1 C8.1 C9.2 C10.1 C11.1 C12.1 C13.1 C14.1 C15.1 C16.1 C18.1 J1.5 J2.5 J3.6 pad.TH@82.525,84.975 R2.1 R4.1 R7.1 U1.8 U1.23 U1.35 U1.47 U1.49 U2.1 U3.1 U3.9 U3.11 U3.18 U3.25 X1.2 X1.4 | length 37.9
  L1(Signal) w0.2: v2(85,67) 85.025,67 85.35,67.325 X1.4 ; C1.1 v2(85,71) ; X1.2 87,68.65 87.554,68.096 87.904,68.096 v2(88,68) ; v2(88,69) C2.1 ; v2(89,70) 89,70.05 89.95,71 C4.1 U1.8 ; C16.1 89.2,81.7 89.416,81.7 89.941,82.225 90.5,82.225 U3.11 ; C15.1 89.05,83.5 89.3,83.25 U3.9 ; U3.18 93.825,80.925 93.825,80.56 93.962,80.424 93.962,80.038 v6(94,80) ; U3.1 93.75,85.225 v2(94.5,85.975) ; v2(95.5,66) C9.2 ; v2@99.336,67.63 99.37,67.63 v2(99.5,67.5) R4.1 ; v2(110.25,74.25) 110.275,74.275 112.165,74.275 J1.5
  L1(Signal) w0.3: v2(88,73.5) C3.1 C5.1 ; v2(88,81.5) C16.1 ; v2(88,83.5) C15.1 ; v2(91.5,77.5) 91.601,77.5 92.15,76.951 92.15,76.9 92.5,76.55 C8.1 92.5,75.747 92.65,75.597 U1.47 ; R2.1 v2(94,78.5) ; v2(95,55.5) 95.062,55.562 95.062,57.338 J3.6 ; v2(95.077,80.167) 95.153,80.244 95.153,80.703 95.95,81.5 C18.1 ; U1.23 97.15,67.85 97.5,67.5 C6.1 v2(97.5,66) ; U1.35 99,74 99.3,74.3 99.3,74.35 99.45,74.5 C7.1 99.65,74.65 100.042,74.65 100.392,75 v2(100.5,75) ; v2(101,87) C10.1 ; v2(101.796,82.54) 101.905,82.54 102.54,83.175 J2.5 ; C13.1 C13.1@105.643,67.5 ; v2(108,68.5) v2@108,68.608 ; C14.1 C14.1@109,63.143 ; R7.1 R7.1@110.95,63.35 ; v2@110.95,64.45 v2(111,64.5)
  other v1: 81.7,55.875 85.7,55.875 91.7,55.875 101.7,55.875 103.7,55.875 105.7,55.875 109.7,55.875 86.7,57.875 96.7,57.875 100.7,57.875 106.7,57.875 110.7,57.875 81.7,59.875 83.7,59.875 85.7,59.875 87.7,59.875 95.7,59.875 97.7,59.875 88.7,61.875 94.7,61.875 96.7,61.875 100.7,61.875 112.7,61.875 83.7,63.875 85.7,63.875 89.7,63.875 95.7,63.875 97.7,63.875 86.7,65.875 88.7,65.875 90.7,65.875 108.7,65.875 110.7,65.875 112.7,65.875 83.7,67.875 111.7,67.875 83.7,71.875 104.7,73.875 106.7,73.875 108.7,73.875 83.7,75.875 85.7,75.875 87.7,75.875 103.7,75.875 105.7,75.875 107.7,75.875 109.7,75.875 84.7,77.875 86.7,77.875 108.7,77.875 110.7,77.875 112.7,77.875 83.7,79.875 85.7,79.875 87.7,79.875 109.7,79.875 111.7,79.875 84.7,81.875 86.7,81.875 108.7,81.875 110.7,81.875 112.7,81.875 109.7,83.875 111.7,83.875 88.7,85.875 90.7,85.875 96.7,85.875 108.7,85.875
  other v2: 106,64 108,64 109,64 106.5,66.5 106.5,67.5 109.5,68.5
  other v3: 92.7,69.55 93.8,69.55 94.9,69.55 96,69.55 97.1,69.55 92.7,70.65 93.8,70.65 94.9,70.65 96,70.65 97.1,70.65 92.7,71.75 93.8,71.75 94.9,71.75 96,71.75 97.1,71.75 92.7,72.85 93.8,72.85 94.9,72.85 96,72.85 97.1,72.85 92.7,73.95 93.8,73.95 94.9,73.95 96,73.95 97.1,73.95 91.95,82.45 93.05,82.45 91.95,83.55 93.05,83.55
IMU_CPOUT: C18.2 U3.20 | length 1.6
  L1(Signal) w0.2: U3.20 94.5,82.275 95.125,82.275 95.35,82.5 C18.2
IMU_INT: U1.45 U3.12 | length 8.9
  L1(Signal) w0.2: U3.12 90.275,81.75 89.858,81.333 89.858,81.327 89.515,80.985 89.515,80.515 93.1,76.93 93.1,76.234 93.64,75.694 93.64,75.16 U1.45
IMU_REGOUT: C16.2 U3.10 | length 1.6
  L1(Signal) w0.2: C16.2 89.65,82.5 89.875,82.725 90.5,82.725 U3.10
IMU_SCL: R5.1 U1.42 U3.23 | length 12.6
  L1(Signal) w0.2: U3.23 96.75,83.75 97,83.5 97,80.5 97.5,80 R5.1 97.5,77.05 96.694,76.244 95.868,76.244 95.225,75.601 95.225,75.514 95.15,75.439 U1.42
IMU_SDA: R6.1 U1.43 U3.24 | length 14.3
  L1(Signal) w0.2: U3.24 97.75,84.25 98,84 v4(98,81) ; U1.43 94.65,76.12 95.9,77.37 95.9,78.9 96.051,79.051 96.051,79.848 v4(96.101,79.899)
  L4(Signal) w0.2: v4(96.101,79.899) 96.899,79.899 v4(98,81)
LED_PWR_K: D2.K R7.2 | length 1.3
  L1(Signal) w0.2: R7.2 110.95,62.25 110.95,61.05 D2.K
MCU_BOOT0: R2.2 U1.44 | length 1.4
  L1(Signal) w0.2: R2.2 94,75.9 94.14,75.76 94.14,75.16 U1.44
MCU_LED_A: D1.A U1.26 | length 1.3
  L1(Signal) w0.2: U1.26 99.228,69.5 99.433,69.705 D1.A
MCU_LED_K: D1.K R4.2 | length 1.3
  L1(Signal) w0.2: D1.K 100.467,69.722 100.467,68.534 R4.2
MCU_NRST: C10.2 J2.3 R3.1 U1.7 | length 41.3
  L1(Signal) w0.2: v4(88.99,71.01) 88.99,71.118 89.249,71.377 89.249,71.459 89.39,71.6 90.43,71.6 90.53,71.5 U1.7 ; J2.3 105,84.215 R3.1 C10.2 103,87.05 103.623,87.673 103.923,87.673 v4(104,87.75)
  L4(Signal) w0.2: v4(88.99,71.01) 89,71.02 89,74.2 88.65,74.55 88.65,76.35 90.45,78.15 92.21,78.15 92.51,77.85 98.55,77.85 100,79.3 100,87.633 100.117,87.75 102.44,87.75 102.593,87.597 103.166,87.597 103.319,87.75 v4(104,87.75)
MCU_OSC_IN: C1.2 U1.5 X1.1 | length 12.9
  L1(Signal) w0.2: X1.1 87,67.883 86.883,68 85.117,68 85,68.117 85,68.95 86,69.95 C1.2 86,72.383 86.117,72.5 U1.5
MCU_OSC_OUT: R1.2 U1.6 | length 4.4
  L1(Signal) w0.2: R1.2 88,71.883 88.117,72 U1.6
MCU_PA4: J3.2 U1.14 | length 12
  L1(Signal) w0.2: J3.2 90.1,57.425 90.1,58.3 90.5,58.7 90.5,61 91,61.5 91,63.5 91.5,64 91.5,65.5 92,66 92,67 92.65,67.65 U1.14
MCU_PA5: J3.3 U1.15 | length 11.7
  L1(Signal) w0.2: J3.3 91.35,57.425 91.35,58.3 91.5,58.45 91.5,60.5 92,61 92,65 93,66 93,66.5 93.15,66.65 U1.15
MCU_PA6: J3.4 U1.16 | length 11.5
  L1(Signal) w0.2: J3.4 92.6,57.425 92.6,58.3 92.5,58.4 92.5,62 93,62.5 93,64 93.5,64.5 93.5,65.5 93.65,65.65 U1.16
MCU_PA7: J3.5 U1.17 | length 11.1
  L1(Signal) w0.2: J3.5 93.85,57.425 93.85,58.825 94.15,59.125 U1.17
MCU_SWCLK: J2.4 U1.37 | length 11.8
  L1(Signal) w0.2: U1.37 98.12,75.15 101.47,78.5 103.946,78.5 104.825,79.379 104.825,81.04 J2.4
MCU_SWDIO: J2.2 U1.34 | length 17.5
  L1(Signal) w0.2: U1.34 100.883,73.5 101,73.617 101,74.581 101.15,74.731 101.15,75.15 104.1,78.1 106.721,78.1 108,79.379 108,80.621 107.121,81.5 106.361,81.5 105.962,81.9 105.235,81.9 J2.2
MCU_SWO: J2.6 U1.39 | length 9.5
  L1(Signal) w0.2: U1.39 96.65,75.439 96.725,75.514 96.725,75.601 96.974,75.85 97.38,75.85 101.825,80.295 101.825,80.75 102.254,81.179 102.254,81.307 102.69,81.744 J2.6
MCU_VCAP1: C9.1 U1.22 | length 1.4
  L1(Signal) w0.3: C9.1 96.625,67.125 96.625,68.325 U1.22
USB_D_N: J1.2 U1.32 | length 14
  L1(Signal) w0.26: U1.32 98.565,72.5 98.583,72.518 104.968,72.518 105.043,72.443 112.097,72.443 J1.2
USB_D_P: J1.3 U1.33 | length 14
  L1(Signal) w0.26: U1.33 98.565,73 98.583,72.982 105.16,72.982 105.235,72.907 112.097,72.907 J1.3
VBUS: C11.2 FB1.1 J1.1
XTAL_IN: C2.2 R1.1 X1.3 | length 2.7
  L1(Signal) w0.3: X1.3 86.2,68.875 86.2,69.099 86.65,69.549 86.65,69.6 87,69.95 C2.2 R1.1
pads on no net: J1.4 J1.6 J1.7 J1.8 J1.9 J1.10 J1.11 J2.MH J3. U1.2 U1.3 U1.4 U1.10 U1.11 U1.12 U1.13 U1.18 U1.19 U1.20 U1.21 U1.25 U1.27 U1.28 U1.29 U1.30 U1.31 U1.38 U1.40 U1.41 U1.46 U3.2 U3.3 U3.4 U3.5 U3.6 U3.7 U3.14 U3.15 U3.16 U3.17 U3.19 U3.21 U3.22

## Polygon pours and split planes (outlines as drawn)
+5V on L1(Signal) "+5V_L01_P025" (solid, pour order 25): 108.875,71.025 108.825,71.075 108.825,72.125 108.2,72.125 107.975,71.9 107.975,71.05 107.575,71.05 107.525,71.1 107.525,70.525 105.075,70.525 103.775,69.225 103.575,68.175 102.075,68.075 101.925,67.925 101.925,65.925 100.525,65.925 100.4,65.8 100.55,65.65 100.55,64.325 102.175,64.325 102.175,65.975 102.15,66 102.175,66.025 103.625,66.025 103.625,67.775 104.15,68.3 106.275,68.3 106.325,68.35 106.325,70.075 108.5,70.075 108.8,70.375 108.8,71.6
G on L1(Signal) "G_L01_P020" (solid, pour order 20): 110,70 107.5,70 107.5,68 104.5,68 104.5,65.9 104.55,65.85 104.7,66 105.5,66 105.5,63.5 107.5,63.5 107.5,61.5 109.5,61.5 109.5,63 112,63 112,65 107,65 107,68 110,68
+3V3 on L1(Signal) "+3V3_L01_P013" (solid, pour order 13): 104.6,65.8 104.5,65.9 104.4,65.8 102.9,65.8 102.9,64.1 102,63.2 102,57.8 102.1,57.7 105.7,57.7 105.7,59.3 109.6,59.3 109.6,61.1 104.6,61.1 104.6,65
VBUS on L1(Signal) "VBUS_L01_P001" (solid, pour order 1): 109.1,72.05 109.1,70.15 110.7,70.15 110.9,70.35 110.9,71.45 113.1,71.45 113.1,72.05
G on L3(GND) "G_L03_P019" (solid, pour order 19): 81,86.46 cw(c83.54,86.46) 83.54,89 112.46,89 cw(c112.46,86.46) 115,86.46 115,56.54 cw(c112.46,56.54) 112.46,54 83.54,54 cw(c83.54,56.54) 81,56.54 81,83
G on L2(GND) "G_L02_P018" (solid, pour order 18): 81,86.46 cw(c83.54,86.46) 83.54,89 112.46,89 cw(c112.46,86.46) 115,86.46 115,56.54 cw(c112.46,56.54) 112.46,54 83.54,54 cw(c83.54,56.54) 81,56.54 81,84

## Silkscreen, mask and mechanical layers (free items; w line width, h text height)
Top Overlay:
  text "SWD" at 102.95,76.65 h1.52
  text "USB" at 111.2,66.375 h1.52
  text "GPIO" at 89.929,59.804 h1.52
Mechanical 1:
  lines w0.254: 80,55.77 ccw(c83.066,55.77) 80.898,53.602 81.102,53.398 ccw(c83.27,55.566) 83.27,52.5 113.73,52.5 ccw(c113.73,55.566) 115.898,53.398 ccw(c114.445,54.851) 116.5,54.851 116.5,87.23 ccw(c113.434,87.23) 115.602,89.398 ccw(c114.149,87.945) 114.149,90 82.27,90 ccw(c82.27,86.934) 80.102,89.102 ccw(c80.348,88.856) 80,88.856 80,80.5 80,55.77

## Text inside footprints (layer, text, board x,y; h text height)
D1: Mechanical 13 "+" at 98.05,70.263 h0.5
D2: Mechanical 13 "+" at 110.492,58.617 h0.5 r90